# Altium PCB demo_dermis_main_testboard.PcbDoc (part 3 of 7)
Units mm, origin at the board's own origin, x right, y up, seen from the top; angles counter-clockwise.
Board outline 348.67 x 252.79 mm, 4 copper layers (Top Layer, Layer 1, Layer 2, Bottom Layer), stack 0.603 mm thick; 389 components, 231 nets, 2086 pads, 2626 vias.
Unrouted connection lines stored in the file: 34.
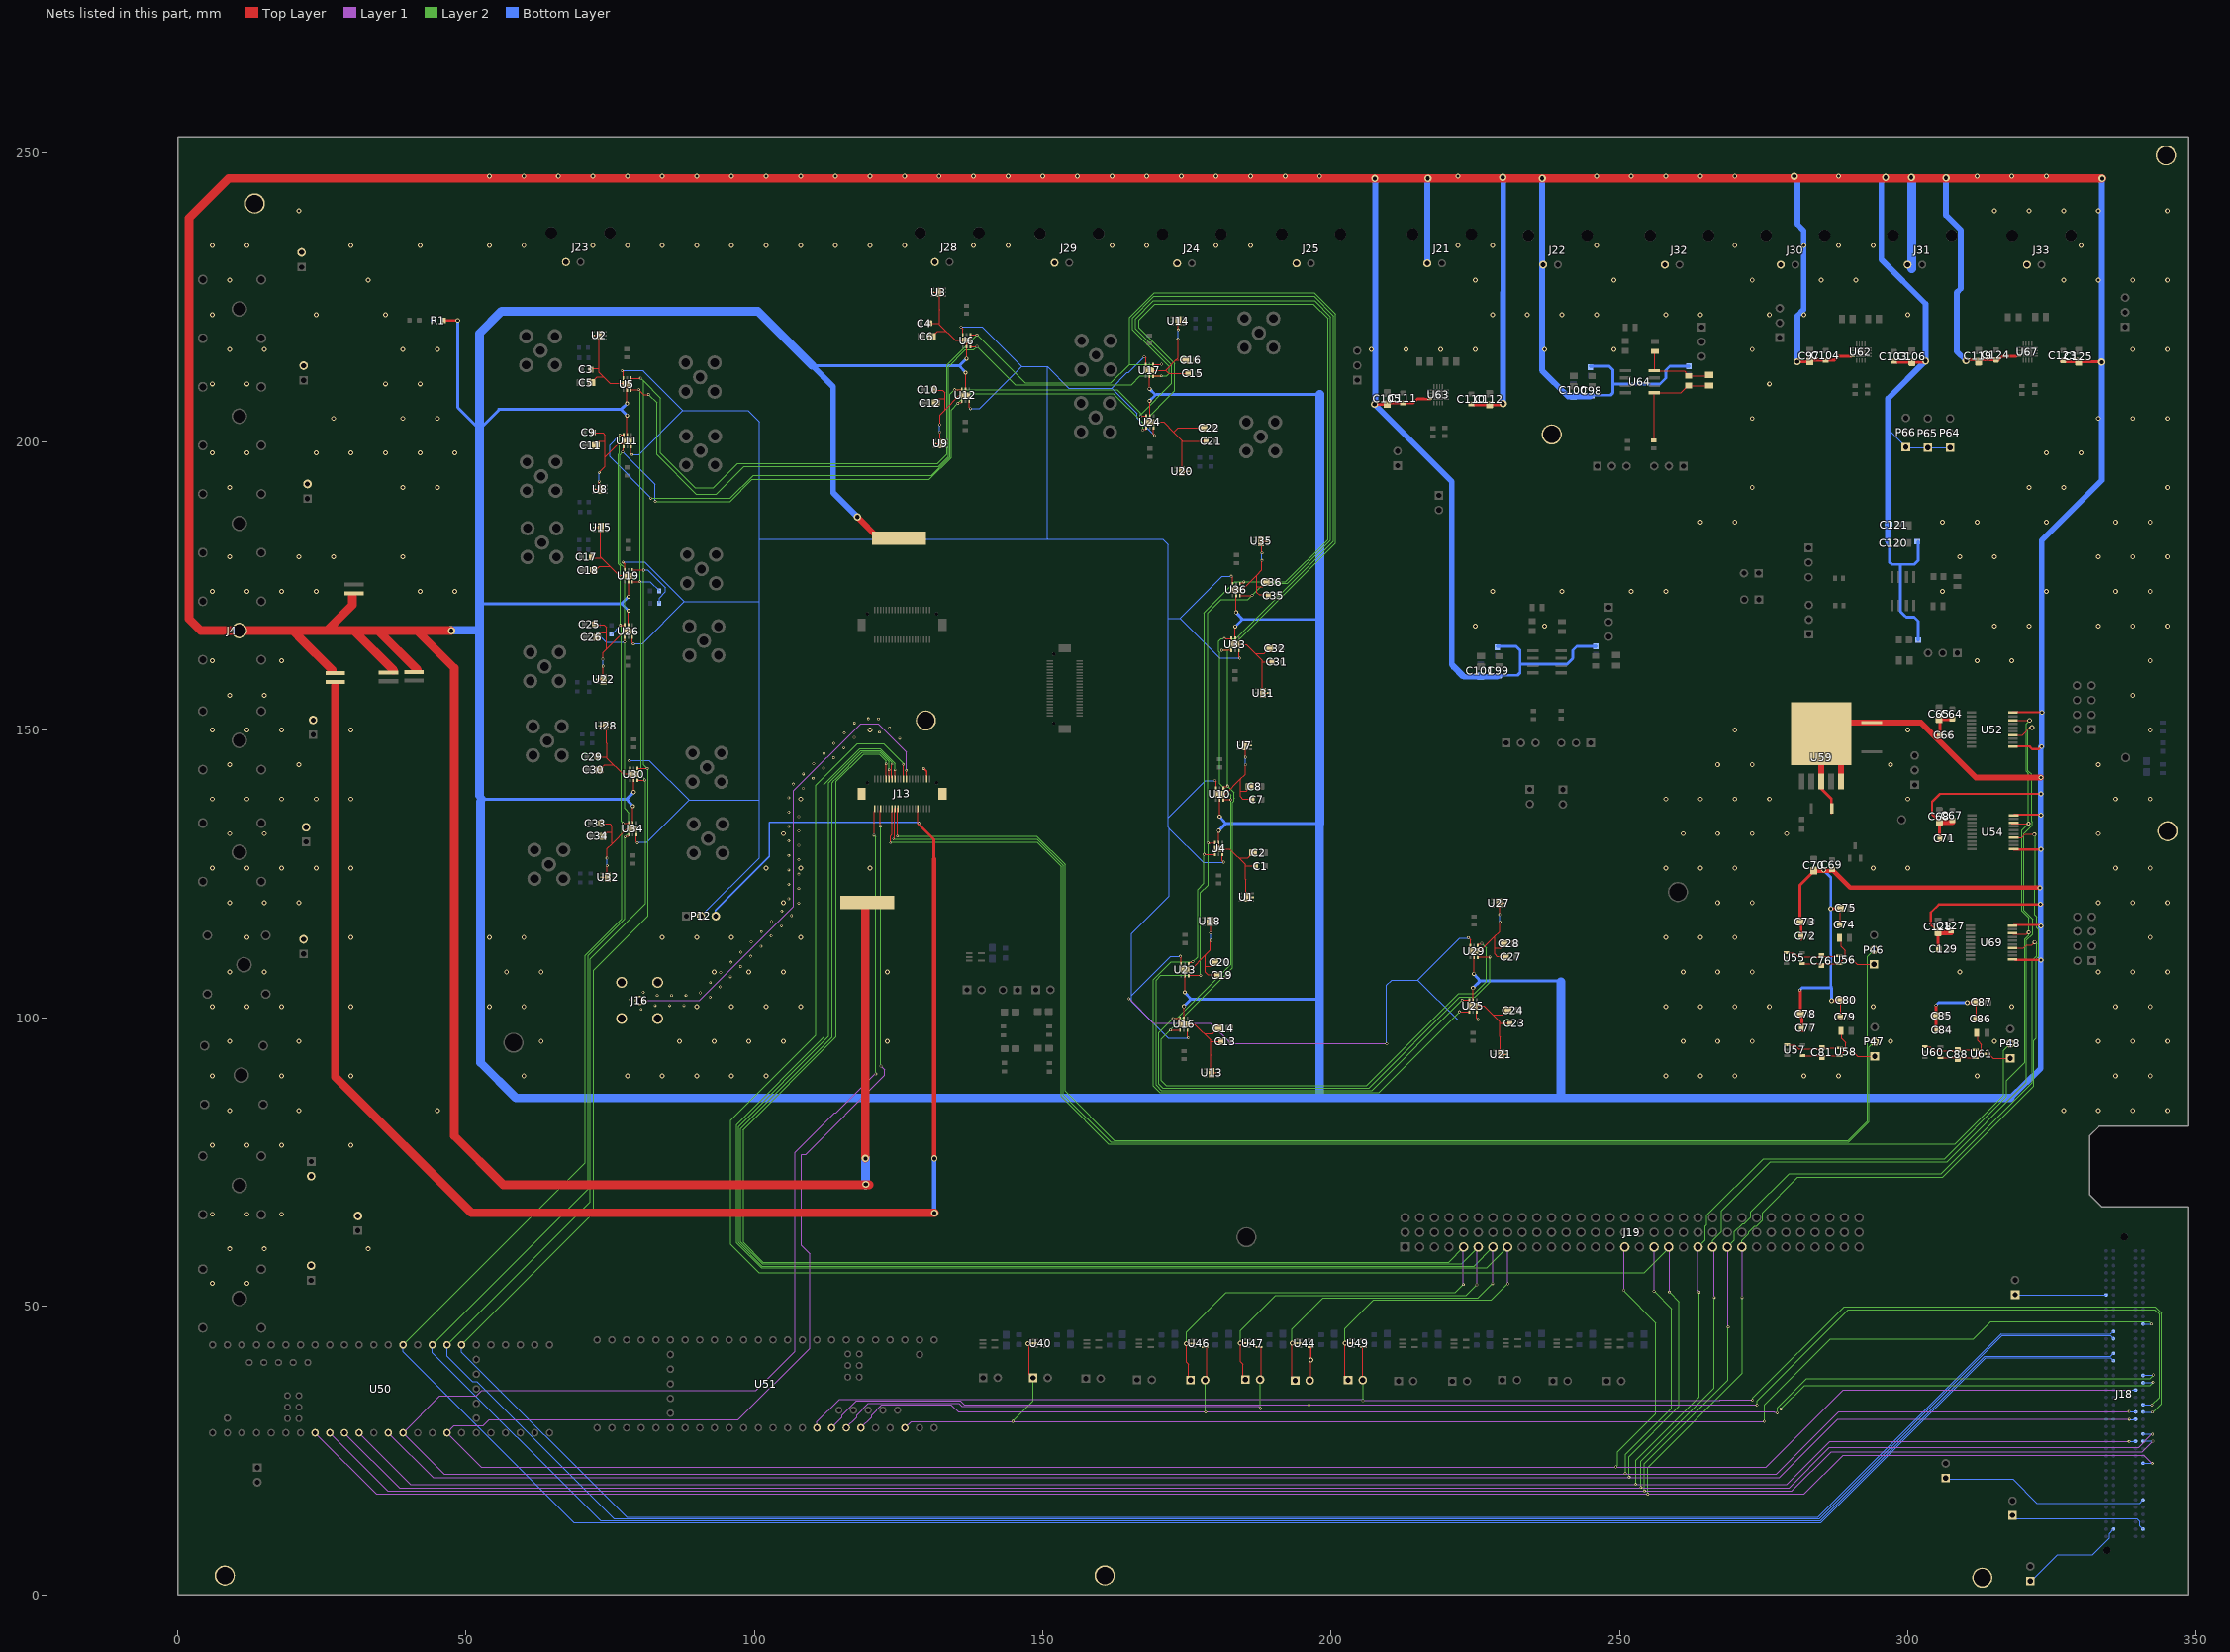
[diagram p4: the nets of this part, all layers, seen from the top]

## Via types
v1: diameter 0.4, hole 0.25, Top Layer to Bottom Layer, 1673 vias
v2: diameter 0.85, hole 0.5, Top Layer to Bottom Layer, 416 vias
v3: diameter 0.5, hole 0.3, Top Layer to Bottom Layer, 391 vias
v4: diameter 1.27, hole 0.711, Top Layer to Bottom Layer, 85 vias
v5: diameter 0.7, hole 0.4, Top Layer to Bottom Layer, 57 vias
v6: diameter 1.1, hole 0.7, Top Layer to Bottom Layer, 4 vias

## Nets (pads, with @x,y where several pads share a name; then routed paths per layer and width w, separated by ;. In a path a pad name is that pad's centre, name@x,y a point inside that pad or via, vN(x,y) a via of type N, cw(c..) or ccw(c..) an arc to the next point about the centre after c; other vN are vias at no path point) (continued)
ACK_EXT: J18.C11 P29.1 U40.2@148.545,43.598 U51.1 | length 243.6
  Top Layer w0.15: P29.1@148.298,37.636 147.622,38.311 147.622,43.179 147.397,43.405 v2(147.397,43.594) 147.399,43.596 148.543,43.596 U40.2@148.545,43.598
  Layer 1 w0.15: U51.1@126.068,28.974 127.164,30.07 144.797,30.07 267.052,30.071 275.119,30.071 v3(275.127,30.078)
  Layer 2 w0.15: v3(144.797,30.078) 144.797,30.118 148.298,33.619 P29.1@148.298,37.636 ; v3(275.127,30.078) 275.127,32.924 286.569,44.365 311.386,44.365 314.386,47.365 341.796,47.365 v3(342.218,46.943)
  Bottom Layer w0.15: J18.C11@340.746,46.956 340.752,46.949 342.212,46.949 v3(342.218,46.943)
ADDRX0: J13.31 J19.13 P36.1 U46.2@176.028,43.593 | length 296.2
  Top Layer w0.15: J13.31@122.841,141.53 v1@122.841,144.094 ; P36.1@175.245,36.979 175.245,40.007 174.879,40.373 v2(174.879,43.589) 174.881,43.592 176.026,43.592 U46.2@176.028,43.593
  Layer 1 w0.15: v3(222.897,53.82) J19.13@222.897,60.341
  Layer 2 w0.15: v1(122.84,144.095) 122.84,144.635 121.646,145.829 118.915,145.829 114.182,141.095 114.182,96.81 97.992,80.619 97.992,61.198 101.478,57.713 220.354,57.713 J19.13@222.964,60.323 ; v2(174.879,43.589) 174.879,45.548 181.739,52.409 221.485,52.409 v3(222.897,53.82)
ADDRX0_EXT: J18.C18 P36.2 U46.4@178.11,42.943 U51.4 | length 243
  Top Layer w0.15: U46.4@178.337,42.944 178.357,42.944 178.46,42.841 P36.2@178.46,37.245
  Layer 1 w0.15: U51.4@118.448,28.974 120.297,30.823 120.297,31.2 122.06,32.964 134.083,32.964 135.308,31.738 v3(178.214,31.739) 193.214,31.739 ; 193.232,31.72 276.796,31.72 276.877,31.639 277.281,31.639 v3(277.347,31.572)
  Layer 2 w0.15: P36.2@178.123,37.245 178.169,37.199 178.169,31.784 v3(178.214,31.739) ; v3(277.347,31.572) 277.347,32.464 282.414,37.53 341.97,37.53 v3(342.577,38.138)
  Bottom Layer w0.15: J18.C18@340.746,38.066 340.781,38.102 342.541,38.102 v3(342.577,38.138)
ADDRX1: J13.29 J19.16 P37.1 U47.2@185.4,43.638 | length 293.7
  Top Layer w0.15: J13.29@123.326,141.537 v1@123.326,143.061 ; P37.1@184.674,36.979 184.674,40.001 184.252,40.424 v2(184.252,43.634) 184.253,43.636 185.398,43.636 U47.2@185.4,43.638
  Layer 1 w0.15: v3(225.25,53.777) J19.16@225.25,60.362
  Layer 2 w0.15: v1(123.316,143.071) 123.316,144.512 121.699,146.129 118.731,146.129 114.044,141.442 114.038,141.442 113.836,141.239 113.836,141.233 113.438,140.835 113.438,96.74 97.551,80.853 97.551,61.231 101.37,57.413 222.594,57.412 J19.16@225.504,60.323 ; v2(184.252,43.634) 184.252,45.843 190.371,51.963 223.436,51.963 v3(225.25,53.777)
ADDRX1_EXT: J18.C19 P37.2 U47.4@187.483,42.988 U51.5 | length 243.7
  Top Layer w0.15: U47.4@187.483,42.988 187.727,42.988 U47.4@187.829,42.886 ; U47.4@187.829,42.988 U47.4@187.829,42.886 ; P37.2@187.89,37.332 187.829,37.392 U47.4@187.829,42.886
  Layer 1 w0.15: U51.5@115.908,28.974 117.757,30.823 117.757,31.2 119.77,33.214 135.435,33.214 135.969,32.679 187.371,32.679 187.753,32.297 277.948,32.297 v3(277.985,32.26)
  Layer 2 w0.15: P37.2@187.675,37.332 187.696,37.311 187.696,32.354 v3(187.717,32.334) ; v3(277.985,32.26) 282.066,36.342 342.004,36.342 v3(342.495,36.833)
  Bottom Layer w0.15: J18.C19@340.746,36.796 340.764,36.814 342.476,36.814 v3(342.495,36.833)
ADDRX2: J13.27 J19.19 P34.1 U44.2@194.362,43.633 | length 291.7
  Top Layer w0.15: J13.27@123.791,141.572 v1@123.791,144.021 ; P34.1@193.218,36.906 193.218,43.624 v2(193.213,43.629) 193.215,43.631 U44.2@194.362,43.633 U44.2@194.362,43.633
  Layer 1 w0.15: v3@228.012,53.976 J19.19@228.012,60.378
  Layer 2 w0.15: v1(123.823,144.052) 123.823,144.359 121.753,146.429 118.474,146.429 112.87,140.826 112.87,96.867 97.205,81.201 97.205,61.121 101.299,57.026 224.748,57.026 J19.19@228.044,60.323 ; v2(193.213,43.629) 193.213,46.083 198.59,51.46 225.475,51.46 v3@227.982,53.967
  other v3: 228.003,53.967
ADDRX2_EXT: J18.C22 P34.2 U44.4@196.444,42.983 U51.6 | length 271
  Top Layer w0.15: P34.2@196.432,37.166 196.432,42.708 ; v2(196.514,40.758) 196.514,42.626 196.432,42.708 ; U44.4@196.851,42.983 U44.4@196.652,42.983 ; 196.432,42.708 196.432,42.763 ; 196.432,42.708 196.405,42.736 196.432,42.763 ; 196.432,42.763 U44.4@196.652,42.983 ; 196.432,42.763 196.432,42.971 U44.4@196.444,42.983 U44.4@196.652,42.983
  Layer 1 w0.15: U51.6@113.368,28.974 115.217,30.823 115.217,31.2 117.664,33.648 135.682,33.648 136.382,32.948 v3(196.173,32.948) 211.173,32.948 273.833,32.947 v3(273.844,32.936)
  Layer 2 w0.15: v3(196.173,32.948) 196.173,36.93 196.112,36.991 P34.2@196.287,37.166 ; v3(273.844,32.936) 273.844,33.633 289.679,49.468 342.775,49.468 343.595,48.648 343.595,34.236 v3@342.296,32.938
  Bottom Layer w0.15: J18.C22@340.746,32.986 340.764,32.967 342.264,32.967 v3(342.282,32.948)
ADDRY0: J13.25 J19.22 P39.1 U49.2@203.531,43.643 | length 289.5
  Top Layer w0.15: J13.25@124.345,141.48 124.36,141.495 124.36,143.017 v1(124.374,143.032) ; P39.1@202.94,37.251 202.382,37.808 v2(202.382,43.639) 202.384,43.642 203.529,43.642 U49.2@203.531,43.643
  Layer 1 w0.15: v3@230.628,53.881 J19.22@230.628,60.25
  Layer 2 w0.15: v1(124.374,143.032) v1(124.374,143.032) v1(124.374,143.032) 124.373,144.174 121.818,146.729 118.284,146.729 112.031,140.477 112.032,96.703 96.905,81.576 96.905,60.996 101.174,56.727 226.988,56.727 J19.22@230.584,60.323 ; v2(202.382,43.639) 202.382,46.139 207.361,51.119 227.763,51.119 v3@230.606,53.961
  other v3: 230.641,53.936
ADDRY0_EXT: J18.C23 P39.2 U49.4@205.614,42.993 U51.7 | length 271.9
  Top Layer w0.15: P39.2@205.48,37.251 205.48,42.891 205.582,42.994 U49.4@205.614,42.993
  Layer 1 w0.15: U51.7@110.828,28.974 110.828,30.005 114.72,33.898 205.317,33.898 v3(205.512,33.703) ; v3@205.512,33.766 205.576,33.766 267.419,33.766 267.438,33.785 v3(273.074,33.785)
  Layer 2 w0.15: P39.2@205.48,37.251 205.512,37.218 v3(205.512,33.703) ; v3(273.074,33.785) 273.074,34.12 288.948,49.993 342.823,49.993 343.957,48.86 343.957,33.137 v3@342.483,31.663
  Bottom Layer w0.15: J18.C23@340.683,31.706 v3@342.183,31.706
  other v3: 342.376,31.674
AER_DIS: J13.36 J18.D20 J19.46 U50.40 | length 513
  Top Layer w0.15: 121.797,133.537 J13.36@121.797,136.036
  Layer 1 w0.15: v3(121.916,91.705) 122.576,91.044 122.576,90.078 108.883,76.384 108.225,76.384 108.167,76.326 108.167,60.566 109.565,59.168 109.565,42.756 97.176,30.367 54.009,30.367 52.99,29.349 47.91,29.349 U50.40@46.67,28.109 52.633,22.146 275.37,22.146 288.755,35.531 v3(338.34,35.531) ; v3@250.742,52.875 J19.46@250.742,60.043
  Layer 2 w0.15: v3(121.916,91.705) v3@121.916,133.267 ; v3(249.363,22.186) 249.363,22.19 249.697,22.524 249.697,24.82 256.275,31.399 256.275,47.142 250.735,52.681 v3(250.735,52.831)
  Bottom Layer w0.1: v3(338.34,35.531) v3@338.343,35.528
  Bottom Layer w0.15: v3@338.343,35.528 339.473,35.528 J18.D20@339.476,35.526
  other v3: 121.854,133.278
AGND: J13.10 P12.3 R3.2 | length 298.5
  Top Layer w0.2: v3@128.345,133.814 J13.10@128.345,136.33
  Top Layer w0.5: v3@128.447,133.694 131.119,131.023 131.119,127.592
  Top Layer w0.8: v6@131.119,75.52 131.119,127.592
  Top Layer w1.5: 27.31,157.646 27.31,89.827 50.888,66.249 v4@131.184,66.249
  Bottom Layer w0.25: P12.3@93.273,117.712 93.243,117.742 93.243,118.712 102.557,128.026 102.557,133.975 128.272,133.975 128.433,133.814 v3(128.512,133.814)
  Bottom Layer w0.8: v4@131.161,66.488 v6@131.161,75.603
  other v4: 131.201,66.22
  other v6: 131.193,75.675
AGND_VCM: P12.2 U4.3 U5.3 U6.3 U10.3 U11.3 U12.3 U16.3 U17.3 U19.3 U23.3 U24.3 U25.3 U26.3 U29.3 U30.3 U33.3 U34.3 U36.3 | length 639.5
  Top Layer w0.15: v3(77.003,212.281) 77.241,212.044 U5.3@77.241,210.991 ; v3(77.175,179.095) 77.51,178.761 77.51,177.821 U19.3@77.49,177.713 ; v3(78.249,144.624) 78.418,144.455 78.418,143.406 78.446,143.378 U30.3@78.418,143.334 ; U11.3@78.571,199.095 78.574,199.016 78.574,197.892 v3(78.729,197.737) ; U26.3@78.764,166.202 78.764,165.124 v3(79.024,164.864) ; U34.3@79.529,131.82 79.514,131.783 79.514,130.624 v3(79.703,130.435) ; v3(135.832,219.829) 136.133,219.529 136.133,218.58 136.16,218.553 U6.3@136.132,218.509 ; U12.3@137.243,206.995 137.228,206.958 137.228,205.902 v3(137.432,205.698) ; v3(167.593,214.702) 167.853,214.442 U17.3@167.853,213.412 ; U24.3@169.22,202.358 169.191,202.327 169.191,201.239 v3(169.41,201.019) ; v3(173.848,110.733) 174,110.581 174,109.469 U23.3@173.986,109.432 ; U16.3@175.097,97.918 175.068,97.874 175.096,97.846 175.061,97.811 175.061,96.79 v3(175.235,96.615) ; v3(179.858,141.211) 180.038,141.031 180.038,139.928 U10.3@180.023,139.892 ; U4.3@181.134,128.378 181.106,128.334 181.133,128.306 181.133,127.255 v3(181.343,127.045) ; v3(182.681,176.63) 182.898,176.413 182.898,175.342 U36.3@182.884,175.305 ; U33.3@183.995,163.791 183.966,163.747 183.994,163.72 183.994,162.597 v3(184.166,162.424) ; v3(223.796,113.973) 224.138,113.631 224.138,112.654 U29.3@224.123,112.617 ; U25.3@225.234,101.103 225.206,101.059 225.234,101.032 225.234,100.017 v3(225.458,99.793)
  Layer 1 w0.2: v3@164.928,103.402 164.928,103.386 169.16,99.154 179.038,99.154 182.62,95.572 v3(209.611,95.572)
  Bottom Layer w0.15: v3(78.729,197.737) 79.955,197.737 79.974,197.757 ; 87.588,205.354 87.588,205.37
  Bottom Layer w0.2: v3(77.003,212.281) 80.677,212.281 80.709,212.25 87.588,205.37 79.974,197.757 ; 77.453,179.12 80.948,179.12 87.828,172.241 80.555,164.969 79.024,164.969 78.791,164.969 ; v3@78.252,144.688 81.747,144.688 88.626,137.809 81.338,130.52 79.703,130.52 v3@79.542,130.52 ; 87.588,205.354 98.862,205.354 100.837,203.378 100.837,183.083 100.837,172.224 ; 87.828,172.224 100.837,172.224 ; 88.626,137.791 100.817,137.791 ; P12.2@90.733,117.712 100.837,127.816 100.837,137.791 100.837,172.224 ; 100.864,183.083 150.816,183.083 ; v3@135.966,219.863 139.461,219.863 146.341,212.983 ; v3@137.256,205.694 137.432,205.694 139.052,205.694 146.341,212.983 ; v3@164.909,103.386 165.418,103.386 ; v3(167.593,214.702) 164.842,211.951 164.642,211.951 161.949,209.258 ; v3(169.41,201.019) 166.362,204.067 166.362,204.844 161.949,209.258 ; v3@173.973,110.732 172.177,110.732 165.418,103.974 ; v3@175.262,96.564 171.767,96.564 165.418,102.913 165.418,103.386 ; v3@180.01,141.192 179.858,141.192 178.214,141.192 171.729,134.707 ; v3@181.3,127.024 177.805,127.024 171.932,132.896 ; v3@182.871,176.606 182.681,176.606 181.075,176.606 173.786,169.317 ; v3@184.16,162.437 180.665,162.437 173.786,169.317 ; v3(209.611,95.572) 209.611,105.708 210.532,106.629 215.026,106.629 ; 224.11,113.918 222.314,113.918 215.026,106.629 ; v3@225.4,99.749 221.905,99.749 215.026,106.629 ; 146.341,212.983 150.78,212.983 ; 150.78,212.983 150.78,183.12 150.816,183.083 ; 150.78,212.983 154.505,209.258 161.949,209.258 ; 150.816,183.083 170.763,183.083 171.729,182.117 171.729,169.29 ; 165.418,103.386 165.418,103.974 ; 165.418,103.974 165.418,114.67 171.932,121.184 171.932,132.896 ; 171.729,134.707 171.729,169.29 ; 171.729,134.707 171.729,133.099 171.932,132.896 ; 171.729,169.29 171.756,169.317 173.786,169.317
  other v3: 164.884,103.375
CATTN_SCL: J18.G13 R46.2 U5.6 U6.6 U10.6 U16.6 U17.6 U19.6 U29.6 U30.6 U33.6 U50.25 | length 910
  Top Layer w0.15: U5.6@78.541,208.934 78.611,209.003 v3(79.927,209.003) 80.785,208.145 v3(81.63,208.145) ; U19.6@78.939,175.699 v3(80.096,175.699) ; U30.6@79.717,141.277 79.781,141.317 79.794,141.304 v3(80.932,141.304) ; U6.6@137.432,216.451 137.495,216.491 137.508,216.478 v3(138.587,216.478) ; U17.6@169.118,211.316 169.218,211.374 v3(170.534,211.374) ; v3(172.582,99.949) 173.72,99.949 173.733,99.936 U16.6@173.797,99.975 ; U10.6@181.396,137.863 181.415,137.844 181.463,137.892 181.464,137.89 v3(182.623,137.89) ; v3(181.48,165.822) 182.618,165.822 182.631,165.809 U33.6@182.695,165.849 ; U29.6@225.496,110.588 225.515,110.569 225.563,110.617 v3(227.512,110.617)
  Layer 2 w0.15: U50.25@46.67,43.349 71.486,68.164 71.486,110.297 81.098,119.909 81.098,141.138 v3(80.932,141.304) 80.932,141.482 80.26,142.154 80.26,175.536 v3(80.096,175.699) 80.239,175.699 80.088,175.85 80.087,208.843 v3(79.927,209.003) ; v3(81.63,208.145) 83.067,206.709 83.067,197.724 89.887,190.903 93.401,190.903 98.193,195.696 131.892,195.696 133.622,197.426 133.622,212.95 136.564,215.891 138,215.891 v3(138.587,216.478) 145.219,209.846 165.351,209.846 166.878,211.374 v3(170.534,211.374) 171.485,211.374 171.887,211.775 171.887,213.005 165.527,219.365 165.527,221.419 169.264,225.156 197.047,225.156 200.433,221.77 200.433,182.741 183.514,165.822 v3(181.48,165.822) 180.951,165.822 180.484,165.354 180.484,163.584 180.636,163.431 180.636,140.668 182.623,138.681 v3(182.623,137.89) 182.623,109.329 173.242,99.949 v3(172.582,99.949) 170.105,97.471 170.105,88.602 170.812,87.895 206.558,87.895 222.321,103.659 224.91,103.659 227.512,106.261 v3(227.512,110.617)
  Bottom Layer w0.15: U50.25@46.67,43.349 46.67,41.393 51.061,37.002 51.845,37.002 75.658,13.188 284.632,13.188 316.384,44.941 335.141,44.941 J18.G13@335.666,44.416 ; v3(80.096,175.699) 81.875,175.699 83.473,174.101 R46.2@83.473,174.079
CATTN_SDA: J18.G12 R45.2 U5.1 U6.1 U10.1 U16.1 U17.1 U19.1 U29.1 U30.1 U33.1 U50.26 | length 908.7
  Top Layer w0.15: U5.1@78.541,210.991 78.561,211.012 78.586,210.986 v3(80.243,210.986) ; U19.1@78.79,177.713 78.889,177.707 v3(80.763,177.707) ; U30.1@79.732,143.324 v3(81.403,143.324) ; U6.1@137.446,218.499 v3(138.587,218.499) ; U17.1@169.118,213.373 169.169,213.381 169.18,213.392 v3(170.579,213.392) ; v3(172.111,97.928) U16.1@173.783,97.928 ; v3(181.009,163.801) U33.1@182.68,163.801 ; U10.1@181.442,140.126 v3@181.88,140.126 ; U29.1@225.542,112.851 v3@225.98,112.851
  Layer 2 w0.15: U50.26@49.21,43.349 72.114,66.252 72.114,108.326 81.573,117.785 81.573,143.155 v3(81.403,143.324) 80.763,143.965 v3(80.763,177.707) 80.749,177.722 80.749,208.403 80.763,208.417 80.763,210.481 ; v3(80.243,210.986) 80.258,210.986 80.763,210.481 ; v3(170.579,213.392) 165.036,213.392 ; v3(181.009,163.801) 182.006,163.801 ; v3(226.106,112.977) 226.92,112.162 226.92,106.374 224.816,104.269 222.117,104.269 206.146,88.298 171.433,88.298 170.571,89.161 170.571,96.387 v3(172.111,97.928) 182.9,108.717 182.9,137.425 183.148,137.673 183.148,138.108 183.123,138.133 183.123,139.159 v3(182.031,140.251) 182.031,163.776 182.006,163.801 ; 80.763,210.481 83.693,207.552 83.693,198.007 89.734,191.966 92.87,191.966 97.073,196.17 131.744,196.17 133.372,197.797 133.372,213.284 v3(138.587,218.499) 146.94,210.146 161.789,210.146 165.036,213.392 ; 165.036,213.392 165.036,221.53 169.303,225.797 197.056,225.797 200.759,222.094 200.759,182.394 182.166,163.801 182.006,163.801
  Bottom Layer w0.15: U50.26@49.21,43.349 49.21,42.054 77.826,13.438 284.392,13.438 316.231,45.278 ; v3(80.763,177.707) 81.454,177.707 84.533,174.629 84.533,173.922 83.476,172.865 R45.2@83.476,171.945 ; 316.195,45.209 316.213,45.191 335.17,45.191 J18.G12@335.666,45.686
CATTP_SCL: J18.G16 R44.2 U4.6 U11.6 U12.6 U23.6 U24.6 U25.6 U26.6 U34.6 U36.6 U50.12 | length 898.1
  Top Layer w0.15: v3(76.642,201.142) 77.226,201.142 77.244,201.124 U11.6@77.272,201.152 ; v3(76.727,168.146) 77.454,168.146 77.507,168.093 U26.6@77.547,168.133 ; v3(77.226,133.775) 78.044,133.775 78.137,133.868 U34.6@78.156,133.849 ; v3(134.696,208.985) 135.794,208.985 135.851,209.043 U12.6@135.87,209.024 ; v3(166.954,204.386) U24.6@167.929,204.386 ; U23.6@175.358,107.403 175.377,107.384 175.425,107.432 v3(177.375,107.432) ; v3(178.619,130.408) 179.758,130.408 179.771,130.395 U4.6@179.834,130.435 ; U36.6@184.256,173.276 184.275,173.257 184.323,173.305 v3(186.273,173.305) ; v3(222.72,103.134) 223.858,103.134 223.871,103.121 U25.6@223.935,103.16
  Layer 2 w0.15: U50.12@39.05,43.349 70.653,74.951 70.653,110.909 76.986,117.243 76.986,133.534 v3(77.226,133.775) 77.226,133.798 76.902,134.122 76.902,135.294 76.902,166.61 ; v3(76.642,201.142) 76.596,201.095 76.596,197.958 76.4,197.762 76.4,178.758 76.727,178.43 v3(76.727,168.146) ; 76.916,166.509 v3@76.916,168.01 ; v3(82.004,190.171) 95.817,190.171 99.801,194.155 130.705,194.155 133.872,197.322 133.872,208.161 v3(134.696,208.985) 134.697,208.984 162.896,208.984 166.954,204.926 v3@166.954,204.632 ; v3(166.954,204.386) v3@166.954,204.632 ; v3(222.72,103.134) 207.078,87.493 170.578,87.493 169.639,88.432 169.639,106.627 170.444,107.432 v3(177.375,107.432) 177.35,107.457 177.35,121.77 178.648,123.068 178.648,130.379 v3(178.619,130.408) 178.619,170.283 180.911,172.575 185.542,172.575 v3(186.273,173.305) 188.382,175.415 192.435,175.415 199.923,182.903 199.923,221.63 197.131,224.422 169.183,224.422 166.04,221.279 166.04,219.56 172.374,213.225 172.374,210.052 v3@166.954,204.632
  Bottom Layer w0.15: U50.12@39.05,43.349 39.05,42.176 68.696,12.53 284.946,12.53 313.516,41.101 335.17,41.101 J18.G16@335.666,40.606 ; R44.2@75.211,166.603 75.233,166.603 76.727,168.097 v3(76.727,168.146) ; v3(76.642,201.142) 74.895,199.395 74.895,197.4 82.004,190.291 v3(82.004,190.171)
CATTP_SDA: J18.G15 R43.2 U4.1 U11.1 U12.1 U23.1 U24.1 U25.1 U26.1 U34.1 U36.1 U50.24 | length 880.6
  Top Layer w0.15: v3(77.121,198.224) 77.121,198.318 77.272,198.469 U11.1@77.272,199.095 ; U26.1@77.392,165.845 77.469,165.769 v3(77.469,165.239) ; v3@77.672,131.586 U34.1@78.11,131.586 ; v3@135.386,206.761 U12.1@135.824,206.761 ; v3@167.445,202.123 U24.1@167.883,202.123 ; U23.1@175.404,109.666 v3@175.843,109.666 ; v3(177.942,128.399) 179.808,128.399 U4.1@179.82,128.387 ; U36.1@184.302,175.539 v3@184.74,175.539 ; v3(222.249,101.113) U25.1@223.92,101.113
  Layer 2 w0.15: U50.24@44.13,43.349 71.186,70.404 71.186,110.913 77.546,117.273 v3(77.546,131.46) 78.208,132.123 78.208,135.641 77.469,136.38 v3(77.469,165.239) 77.469,178.059 76.65,178.878 76.65,197.658 77.121,198.129 v3(77.121,198.224) ; v3(82.778,189.592) 95.744,189.592 99.569,193.416 130.32,193.416 134.122,197.219 134.122,205.497 v3(135.26,206.635) 136.95,208.325 162.24,208.325 167.319,203.246 ; v3(167.319,201.998) 167.319,203.246 ; 176.847,122.303 176.847,110.67 v3(175.968,109.792) 172.288,109.792 169.171,106.675 169.171,88.228 170.276,87.124 208.26,87.124 v3(222.249,101.113) ; 176.857,122.303 177.942,123.388 v3(177.942,128.399) 177.942,128.594 177.939,128.597 177.939,170.276 183.328,175.665 v3(184.866,175.665) 192.095,175.665 199.436,183.006 199.436,221.3 196.909,223.826 169.447,223.826 166.684,221.063 166.684,219.715 172.891,213.508 172.891,208.834 167.319,203.262 167.319,203.246
  Bottom Layer w0.15: U50.24@44.13,43.349 44.13,41.981 73.269,12.842 284.81,12.842 313.318,41.351 335.141,41.351 J18.G15@335.666,41.876 ; R43.2@72.904,166.56 72.927,166.56 73.727,165.759 73.727,165.737 74.225,165.239 v3(77.469,165.239) ; v3(77.121,198.224) 82.778,192.567 v3(82.778,189.592)
CLK: J13.17 J16.1 | length 84.6
  Top Layer w0.15: J13.17@126.345,141.48 v1@126.345,142.977
  Layer 1 w0.15: 126.179,146.332 126.342,146.169 126.342,143.004 v1(126.347,142.999)
  Layer 1 w0.2: J16.1@80.069,103.068 90.485,103.068 106.799,119.382 106.799,139.443 118.407,151.051 121.46,151.051 126.179,146.332
CSb_IDAC: J18.C30 J19.70 U50.19 U54.14 | length 489.5
  Top Layer w0.2: U54.14@317.876,131.301 U54.14@318.359,131.301 319.748,131.301 320.318,131.871 321.878,131.871 321.907,131.841 v5(321.943,131.841)
  Layer 1 w0.15: U50.19@23.81,28.109 34.424,17.495 282.026,17.495 288.759,24.229 340.868,24.229 v3@342.343,22.754
  Layer 1 w0.2: v3(271.261,51.567) J19.70@271.261,60.017
  Layer 2 w0.15: v3(254.896,17.49) 254.896,22.103 271.261,38.468 v3(271.261,51.567) ; J19.70@271.224,60.323 271.224,61.448 272.43,62.655 272.43,62.943 273.453,63.966 273.741,63.966 274.764,64.988 274.764,66.251 280.908,72.396 306.001,72.396 321.844,88.239 321.844,96.112 322.256,96.524 322.256,110.276 322.707,110.727 322.707,115.385 322.382,115.71 322.382,117.601 322.022,117.961 322.022,122.988 322.107,123.073 322.107,131.677 v5(321.943,131.841)
  Bottom Layer w0.15: J18.C30@340.66,22.796 v3@342.16,22.796
  other v3: 342.353,22.764
CSb_VDAC: J18.C26 J19.64 U50.17 U52.14 | length 506
  Top Layer w0.2: U52.14@318.51,149.1 318.524,149.086 319.853,149.086 v2@321.359,150.593
  Layer 1 w0.15: U50.17@28.89,28.109 38.42,18.579 279.404,18.579 286.424,25.598 340.001,25.598 v3@342.344,27.942
  Layer 1 w0.2: v3(266.41,51.564) J19.64@266.41,60.178
  Layer 2 w0.15: v3(253.71,18.625) 253.71,23.152 266.41,35.852 v3(266.41,51.564) ; J19.64@266.144,60.323 266.144,61.448 267.684,62.988 267.684,66.618 276.203,75.137 306.803,75.137 320.576,88.91 320.576,113.522 321.632,114.578 321.632,117.174 320.099,118.707 320.099,132.009 321.571,133.481 321.571,134.02 321.45,134.141 321.45,142.288 320.841,142.897 320.841,150.074 321.349,150.583 v2@321.359,150.593
  Bottom Layer w0.15: J18.C26@340.741,27.884 v3@342.24,27.884
  other v2: 321.513,150.42
  other v3: 342.434,27.852
CSb_VDAC_COMP: J18.C27 J19.67 U50.18 U69.14 | length 468.9
  Top Layer w0.2: U69.14@318.16,112.147 320.033,112.147 320.603,112.717 321.531,112.717 v5(321.989,113.176)
  Layer 1 w0.15: U50.18@26.35,28.109 36.427,18.032 v3(254.305,18.032) 279.897,18.032 286.692,24.828 340.653,24.828 v3(342.469,26.643)
  Layer 1 w0.2: v3(268.837,46.439) J19.67@268.837,60.425
  Layer 2 w0.15: v3(254.305,18.032) 254.305,22.753 268.837,37.286 v3(268.837,46.439) ; J19.67@268.684,60.323 269.942,61.581 269.942,62.995 271.35,64.403 271.638,64.403 272.764,65.528 272.764,66.421 279.416,73.073 305.8,73.073 321.594,88.868 321.594,110.065 322.349,110.82 322.349,112.816 v5(321.989,113.176)
  Bottom Layer w0.15: J18.C27@340.775,26.675 v3@342.275,26.675
CT_MODE: J13.19 J18.D24 J19.55 U50.14 | length 629.3
  Top Layer w0.15: v1(125.831,144.007) 125.799,143.975 125.799,141.526 J13.19@125.845,141.48
  Layer 1 w0.15: U50.14@36.51,28.109 44.272,20.346 277.715,20.346 287.825,30.457 v3(338.404,30.457) ; v3(258.658,52.534) J19.55@258.658,60.323
  Layer 2 w0.15: v1(125.831,144.007) 125.831,144.19 122.367,147.654 117.87,147.654 110.591,140.375 110.591,97.063 95.852,82.324 95.852,60.777 100.766,55.862 254.313,55.862 258.524,60.073 J19.55@258.524,60.323 ; v3(251.652,20.437) 251.652,23.991 260.343,32.683 260.343,50.849 v3(258.658,52.534)
  Bottom Layer w0.15: v3@338.443,30.418 J18.D24@339.456,30.418
FPGA_3P3V: J18.C39 P41.1 | length 24
  Bottom Layer w0.15: P41.1@318.148,13.786 318.723,13.211 339.701,13.211 340.176,12.735 340.176,11.965 J18.C39@340.746,11.396
FPGA_12V: J18.C35 P40.1 | length 36.2
  Bottom Layer w0.15: P40.1@306.568,20.257 306.775,20.05 318.241,20.05 322.365,15.926 ; 322.365,15.901 340.171,15.901 J18.C35@340.746,16.476
FPGA_TEST0: J18.H07 P42.1 | length 15.8
  Bottom Layer w0.15: P42.1@318.599,52.058 318.622,52.036 J18.H07@334.396,52.036
FPGA_VADJ: J18.G39 P43.1 | length 18.8
  Bottom Layer w0.15: P43.1@321.125,2.155 325.941,6.972 332.012,6.972 334.941,9.9 334.941,10.671 J18.G39@335.666,11.396
GAIN_HI: J13.40 J18.D23 J19.52 U50.13 | length 525.3
  Top Layer w0.15: 120.732,131.978 J13.40@120.732,135.863
  Layer 1 w0.15: v3(121.036,90.314) 120.885,90.314 114.159,83.588 113.894,83.588 107.059,76.753 107.059,42.269 100.251,35.461 52.726,35.461 51.761,34.496 45.438,34.496 U50.13@39.05,28.109 46.218,20.941 251.003,20.941 251.413,20.941 251.434,20.962 251.869,20.962 251.891,20.941 277.177,20.941 288.029,31.794 v3(338.384,31.794) ; v3(255.977,52.674) J19.52@255.977,60.323
  Layer 2 w0.15: v3@120.745,131.877 120.745,131.719 121.036,131.427 v3(121.036,90.314) ; v3(251.003,21.047) 251.003,24.336 259.021,32.354 259.021,49.63 v3(255.977,52.674)
  Bottom Layer w0.15: v3(338.384,31.794) 338.423,31.755 339.437,31.755 J18.D23@339.476,31.716
  other v3: 120.707,131.719
GND: C1.2 C2.2 C3.2 C4.2 C5.2 C6.2 C7.2 C8.2 C9.2 C10.2 C11.2 C12.2 C13.2 C14.2 C15.2 C16.2 C17.2 C18.2 C19.2 C20.2 C21.2 C22.2 C23.2 C24.2 C25.2 C26.2 C27.2 C28.2 C29.2 C30.2 C31.2 C32.2 C33.2 C34.2 C35.2 C36.2 C64.2 C65.2 C66.2 C67.2 C68.2 C69.2 C70.2 C71.2 C72.2 C73.2 C74.2 C75.2 C77.2 C78.2 C79.2 C80.2 C82.2 C83.2 C84.2 C85.2 C86.2 C87.2 C89.2 C90.2 C97.1 C98.2 C99.2 C100.2 C101.2 C103.2 C104.1 C105.1 C106.2 C108.2 C109.2 C110.2 C111.1 C112.2 C115.2 C119.1 C120.2 C121.2 C123.2 C124.1 C125.2 C126.2 C127.2 C128.2 C129.2 J4.1 J13.3 J13.S1 J13.S2 J14.1 J15.1 J16.2 J16.3 J16.4 J16.5 J21.1 J22.1 J23.1 J24.1 J25.1 J28.1 J29.1 J30.1 J31.1 J32.1 J33.1 P1.2 P2.2 P3.2 P4.2 P5.2 P6.2 P7.2 P8.2 P9.2 P64.1 P65.1 P66.1 pad.3@8.139,3.365 pad.3@13.354,241.272 pad.3@129.713,151.619 pad.3@160.728,3.388 pad.3@238.23,201.224 pad.3@312.919,2.984 pad.3@344.731,249.608 pad.3@345.027,132.439 R1.2 R2.1 R3.1 R4.1 R5.1 U1.5 U1.7 U2.5 U2.7 U3.5 U3.7 U4.5 U4.7 U5.5 U5.7 U6.5 U6.7 U7.5 U7.7 U8.5 U8.7 U9.5 U9.7 U10.5 U10.7 U11.5 U11.7 U12.5 U12.7 U13.5 U13.7 U14.5 U14.7 U15.5 U15.7 U16.5 U16.7 U17.5 U17.7 U18.5 U18.7 U19.5 U19.7 U20.5 U20.7 U21.5 U21.7 U22.5 U22.7 U23.5 U23.7 U24.5 U24.7 U25.5 U25.7 U26.5 U26.7 U27.5 U27.7 U28.5 U28.7 U29.5 U29.7 U30.5 U30.7 U31.5 U31.7 U32.5 U32.7 U33.5 U33.7 U34.5 U34.7 U35.5 U35.7 U36.5 U36.7 U52.11 U52.20 U54.11 U54.20 U59.3 U59.5 U59.6 U62.16 U63.16 U67.16 U69.11 U69.20 | length 2911.2
  Top Layer w0.15: U15.5@72.283,185.099 73.309,185.099 U15.7@73.312,185.099 ; 171.266,212.33 171.792,211.804 C15.2@175.184,211.804 ; 172.719,201.618 173.438,202.337 C22.2@177.892,202.337 ; 173.035,214.099 C16.2@174.754,214.099 ; U14.7@173.477,220.9 U14.5@174.506,220.9 ; 174.158,200.053 174.17,200.042 C21.2@178.322,200.042 ; C75.2@287.999,118.994 288.253,118.994 C75.2@288.263,119.087 ; C80.2@288.1,103.043 288.354,103.043 C80.2@288.364,103.135 ; C87.2@311.63,102.709 311.884,102.709 C87.2@311.894,102.802
  Top Layer w0.2: C3.2@71.358,212.66 73.023,212.66 ; C5.2@71.779,210.373 71.855,210.373 72.705,211.223 73.797,211.223 ; C17.2@71.82,179.808 73.48,179.808 ; C9.2@71.947,201.474 71.957,201.486 73.69,201.486 74.103,201.072 74.103,200.074 ; U2.5@72.034,218.377 U2.7@73.062,218.377 73.062,211.957 73.797,211.223 ; C11.2@72.111,199.224 72.186,199.224 73.036,200.074 74.103,200.074 ; C25.2@72.157,168.208 73.89,168.208 74.303,167.795 74.303,166.797 ; U8.5@72.22,191.718 U8.7@73.249,191.718 73.082,191.885 v3(73.082,193.079) ; C18.2@72.316,177.521 73.166,178.371 74.824,178.371 ; C26.2@72.385,165.946 73.236,166.797 74.303,166.797 ; C29.2@72.667,145.331 74.327,145.331 ; U22.5@72.791,158.73 U22.7@73.82,158.73 ; v3(73.06,194.625) 74.103,195.667 74.103,197.315 ; C30.2@73.088,143.044 73.163,143.044 74.013,143.894 75.544,143.894 ; C33.2@73.171,133.707 74.903,133.707 75.316,133.295 75.316,132.296 ; U28.5@73.21,150.72 U28.7@74.239,150.72 ; U15.7@73.309,185.099 73.309,179.98 73.48,179.808 ; C34.2@73.399,131.446 74.25,132.296 75.316,132.296 ; U32.5@73.536,124.443 U32.7@74.565,124.443 ; U22.7@73.731,159.505 v3(73.731,161.057) ; v3@73.754,162.291 73.754,163.438 77.64,167.324 U26.7@78.149,167.324 ; 74.303,164.037 74.303,166.797 ; U28.7@74.407,150.552 74.374,150.518 74.374,147.68 74.407,147.646 74.407,145.073 77.135,142.344 U30.7@78.516,142.344 ; U32.7@74.427,125.001 v3(74.427,126.473) ; v3@74.45,127.786 74.45,129.428 75.335,130.313 ; U19.7@77.49,176.778 76.51,176.778 73.48,179.808 ; U11.5@77.891,200.878 v5(77.891,204.498) ; v5(77.891,206.59) U5.5@77.891,208.934 77.891,209.4 77.61,209.682 77.172,210.12 74.9,210.12 73.797,211.223 ; U11.5@77.922,201.152 U11.7@77.922,200.124 77.501,199.703 76.491,199.703 74.103,197.315 ; U26.7@78.151,167.136 v5(78.151,170.65) ; v5(78.157,173.096) U19.7@78.157,176.706 ; U34.7@78.878,132.849 78.845,132.819 77.841,132.819 75.335,130.313 ; U34.7@78.893,133.239 v5(78.893,136.753) ; v5(79.052,139.199) U30.7@79.052,142.259 ; C4.2@130.381,220.506 132.041,220.506 ; C6.2@130.802,218.218 130.877,218.218 131.727,219.068 133.259,219.068 ; C10.2@130.885,208.882 132.618,208.882 133.031,208.469 133.031,207.471 ; U3.5@130.924,225.895 U3.7@131.953,225.895 ; C12.2@131.114,206.621 131.964,207.471 133.031,207.471 ; U9.5@131.25,199.618 U9.7@132.279,199.618 ; U3.7@132.121,225.727 132.088,225.693 132.088,222.854 132.121,222.821 132.121,220.247 134.849,217.519 U6.7@136.231,217.519 ; U9.7@132.141,200.175 v3(132.141,201.647) ; v3@132.165,202.961 132.165,204.603 133.049,205.487 ; U12.7@136.593,208.023 136.559,207.994 135.555,207.994 133.049,205.487 ; U12.7@136.607,208.414 v5(136.607,211.928) ; v5(136.766,214.373) U6.7@136.766,217.434 ; U17.5@168.469,211.316 U17.7@168.469,212.345 168.482,212.33 171.266,212.33 173.035,214.099 173.445,214.51 v3@173.445,217.901 ; v5@168.476,209.147 U17.5@168.476,211.308 ; v5@168.523,207.008 168.523,203.434 U24.7@168.57,203.387 ; U24.7@169.379,203.394 170.943,203.394 172.719,201.618 174.158,200.179 174.158,200.053 174.158,194.824 U20.5@175.151,194.824 ; v3(173.469,219.369) U14.7@173.469,220.92 ; U16.7@174.463,98.993 v5(174.463,102.054) ; v5(174.621,104.499) U23.7@174.621,108.013 ; U23.7@174.636,108.403 174.669,108.433 175.673,108.433 178.18,110.94 ; U16.7@174.998,98.908 176.379,98.908 179.107,96.179 179.107,93.606 179.141,93.573 179.141,90.734 U13.7@179.107,90.7 ; 177.97,97.358 179.501,97.358 180.351,98.209 C14.2@180.426,98.209 ; U18.7@178.95,116.809 U18.5@179.978,116.809 ; v3@179.064,113.466 179.064,111.824 178.18,110.94 ; v3(179.088,114.779) U18.7@179.088,116.251 ; 179.188,95.921 C13.2@180.848,95.921 ; U13.7@179.275,90.532 U13.5@180.304,90.532 ; C20.2@180.115,109.806 179.265,108.956 178.198,108.956 ; C19.2@180.343,107.545 178.611,107.545 178.198,107.957 178.198,108.956 ; U4.7@180.5,129.453 v5(180.5,132.513) ; v5(180.659,134.959) U10.7@180.659,138.473 ; U10.7@180.673,138.863 180.706,138.893 181.711,138.893 184.217,141.399 ; U4.7@181.035,129.367 182.417,129.367 185.145,126.639 185.145,124.066 185.178,124.032 185.178,121.193 U1.7@185.145,121.16 ; U33.7@183.361,164.866 v5(183.361,167.927) ; v5(183.519,170.372) U36.7@183.519,173.886 ; U36.7@183.534,174.277 183.567,174.306 184.571,174.306 187.078,176.813 ; U33.7@183.896,164.781 185.277,164.781 188.005,162.053 188.005,159.479 188.039,159.446 188.039,156.607 U31.7@188.005,156.573 ; 184.007,127.818 185.539,127.818 186.389,128.668 C2.2@186.464,128.668 ; U7.7@184.987,147.269 U7.5@186.016,147.269 ; v3@185.101,143.925 185.101,142.283 184.217,141.399 ; v3(185.125,145.239) U7.7@185.125,146.711 ; 185.225,126.381 C1.2@186.885,126.381 ; U1.7@185.313,120.992 U1.5@186.341,120.992 ; C8.2@186.152,140.266 185.302,139.416 184.235,139.416 ; C7.2@186.381,138.004 184.648,138.004 184.235,138.417 184.235,139.416 ; 186.868,163.232 188.399,163.232 189.249,164.082 C32.2@189.324,164.082 ; U35.7@187.847,182.682 U35.5@188.876,182.682 ; v3@187.962,179.339 187.962,177.697 187.078,176.813 ; v3(187.986,180.653) U35.7@187.986,182.125 ; 188.085,161.794 C31.2@189.746,161.794 ; U31.7@188.173,156.405 U31.5@189.202,156.405 ; C36.2@189.013,175.679 188.163,174.829 187.096,174.829 ; C35.2@189.241,173.418 187.509,173.418 187.096,173.831 187.096,174.829 ; C110.2@224.309,206.526 C110.2@224.444,206.391 ; U25.7@224.6,102.178 v5(224.6,105.239) ; v5(224.759,107.684) U29.7@224.759,111.198 ; U29.7@224.774,111.589 224.807,111.618 225.811,111.618 228.317,114.125 ; U25.7@225.136,102.093 226.517,102.093 229.245,99.365 229.245,96.791 229.278,96.758 229.278,93.919 U21.7@229.245,93.885 ; 228.108,100.544 229.639,100.544 230.489,101.394 C24.2@230.564,101.394 ; U27.7@229.087,119.994 U27.5@230.116,119.994 ; v3@229.201,116.651 229.201,115.009 228.317,114.125 ; v3(229.225,117.965) U27.7@229.225,119.436 ; 229.325,99.106 C23.2@230.985,99.106 ; U21.7@229.413,93.717 U21.5@230.442,93.717 ; C28.2@230.252,112.991 229.402,112.141 228.336,112.141 ; C27.2@230.481,110.73 228.749,110.73 228.336,111.143 228.336,112.141 ; U59.6@287.664,147.017 U59.6@288.412,147.017 ; C75.2@287.999,118.994 288.265,118.728 C74.2@288.265,116.454 ; C80.2@288.1,103.043 288.366,102.777 C79.2@288.366,100.503 ; C103.2@297.586,213.898 C103.2@297.721,213.762 ; C128.2@305.237,114.903 C128.2@305.237,114.979 ; C68.2@305.453,134.057 C68.2@305.453,134.132 ; C87.2@311.63,102.709 311.896,102.443 C86.2@311.896,100.169 ; 74.103,197.315 74.103,200.074 ; 75.316,132.296 75.316,130.33 75.335,130.313 ; 133.031,207.471 133.031,205.505 133.049,205.487 ; 178.18,110.94 178.198,110.922 178.198,108.956 ; 184.217,141.399 184.235,141.381 184.235,139.416 ; 187.078,176.813 187.096,176.795 187.096,174.829 ; 228.317,114.125 228.336,114.107 228.336,112.141
  Top Layer w0.3: v3(129.347,143.314) 129.845,142.815 129.845,141.999 J13.3@129.845,141.48
  Top Layer w0.4: C128.2@305.237,114.979 303.993,116.222 303.993,118.353 305.378,119.738 v2@323.328,119.738 ; C68.2@305.453,134.132 304.209,135.376 304.209,137.507 305.594,138.892 v2(323.044,138.892) ; U52.11@318.253,147.136 321.092,147.136 321.579,146.649 322.625,146.649 v2@323.107,147.131 ; U52.20@318.253,152.986 318.253,153.015 318.298,153.061 v2@323.235,153.061 ; U54.11@318.359,129.351 318.359,129.272 v2@322.991,129.272 ; U69.20@318.419,116.168 v2@323.103,116.168 ; U54.20@318.446,135.288 v2@323.129,135.288 ; U69.11@318.643,110.197 318.643,110.118 v2@323.276,110.118
  Top Layer w0.5: R1.2@46.195,220.992 v2(48.535,220.992) ; v5@168.476,209.147 v5(168.485,209.139) ; v5(168.485,207.047) v5@168.523,207.008 ; v4(207.524,206.448) 207.545,206.469 209.696,206.469 C105.1@209.717,206.49 209.929,206.702 214.246,206.702 ; 214.222,206.679 214.246,206.702 ; 214.254,206.702 214.246,206.702 ; 216.116,207.379 216.092,207.403 214.947,207.403 214.246,206.702 ; 216.143,207.353 U63.16@217.143,207.353 ; C110.2@224.444,206.391 C112.2@227.435,206.391 v4@229.692,206.391 ; v4(280.801,213.819) 280.822,213.841 282.973,213.841 C97.1@282.994,213.861 283.206,214.073 287.308,214.073 288.009,214.774 289.203,214.774 289.229,214.747 U62.16@290.229,214.747 ; C73.2@281.254,116.724 281.254,123.035 283.718,125.499 C70.2@283.718,125.573 ; C73.2@281.268,116.581 281.268,116.112 281.495,115.885 281.495,113.699 ; C78.2@281.355,100.773 v3@281.355,104.837 ; C78.2@281.369,100.63 281.369,100.161 281.596,99.934 281.596,97.748 ; U59.3@284.829,141.851 284.829,139.933 286.731,138.031 C82.2@286.731,135.635 ; v2(286.643,118.994) C75.2@287.999,118.994 ; v2(286.744,103.043) C80.2@288.1,103.043 ; C103.2@297.721,213.762 C106.2@300.712,213.762 v4@302.969,213.762 ; C84.2@304.899,97.846 v3(304.899,102.272) ; C129.2@305.237,111.716 C128.2@305.237,114.602 ; C71.2@305.453,130.869 C68.2@305.453,133.755 ; C66.2@305.533,149.052 305.603,149.052 C65.2@305.603,151.556 ; C65.2@305.603,151.775 C64.2@307.866,151.775 ; v4(310.107,214.002) 310.237,214.133 315.703,214.133 316.354,214.783 318.746,214.783 ; v2(310.274,102.709) C87.2@311.63,102.709 ; C123.2@326.617,213.822 v4@333.653,213.822
  Top Layer w0.8: C70.2@283.718,125.573 C69.2@286.652,125.573 ; C69.2@286.841,125.763 286.891,125.763 290.019,122.634 312.945,122.634 312.917,122.631 v2(322.882,122.631)
  Top Layer w1: v4(117.844,186.91) 121.502,183.253 J14.1@125.062,183.253 ; U59.3@284.985,141.728 U59.6@284.985,149.335 ; U59.6@286.392,147.927 U59.6@284.985,149.335 ; U59.5@288.412,141.711 U59.6@288.412,147.017 ; 302.08,151.275 286.919,151.275 U59.6@284.982,149.338 U59.6@284.985,149.335 ; 302.255,151.275 305.005,148.525 311.793,141.737 v2(323.064,141.737) ; C128.2@305.237,114.821 C127.2@307.501,114.821 ; C68.2@305.453,133.974 C67.2@307.716,133.974
  Top Layer w1.5: 8.803,245.641 1.933,238.771 1.933,169.255 3.968,167.22 J4.1@10.67,167.22 19.924,167.22 ; 9.092,245.64 178.117,245.64 207.57,245.64 216.759,245.64 229.749,245.64 236.597,245.64 280.288,245.64 296.124,245.641 306.617,245.641 v4@333.69,245.641 ; 26.805,160.339 26.197,160.947 21.822,165.322 19.924,167.22 ; 30.265,173.167 30.265,171.63 25.855,167.22 ; 37.411,160.306 30.497,167.22 ; R5.1@41.528,160.381 34.688,167.22 ; v4@47.404,167.22 41.422,167.22 ; v4@119.234,75.68 J15.1@119.235,119.782 ; v4@119.894,71.125 56.418,71.125 47.941,79.602 47.941,160.701 41.422,167.22 ; 239.751,245.613 243.251,245.609 246.751,245.605 ; 19.924,167.22 25.855,167.22 ; 25.855,167.22 30.497,167.22 ; 30.497,167.22 34.688,167.22 ; 34.688,167.22 41.422,167.22
  Bottom Layer w0.15: v4@47.286,167.274 47.44,167.12 v4(47.44,167.184)
  Bottom Layer w0.2: v3(73.06,194.625) 73.082,194.603 v3(73.082,193.079) ; v3@73.719,161.067 v3@73.719,162.234 ; v3@74.415,126.563 v3@74.415,127.729 ; v3@132.13,201.738 v3@132.13,202.904 ; v3@173.48,217.901 v3@173.48,219.358 ; v3@179.099,113.523 v3@179.099,114.689 ; v3@185.136,143.982 v3@185.136,145.149 ; v3@187.997,179.396 v3@187.997,180.562 ; v3@229.236,116.708 v3@229.236,117.874 ; 296.579,202.095 P66.1@299.657,199.017 ; P66.1@299.139,198.922 P65.1@303.467,198.922 P64.1@307.796,198.922
  Bottom Layer w0.5: v2(48.535,220.992) 48.55,205.897 52.326,202.122 55.63,205.426 55.63,205.612 76.912,205.612 v5(77.891,206.59) ; 52.43,171.87 76.931,171.87 v5(78.151,170.65) ; 52.953,137.973 77.826,137.973 v5(78.893,136.753) ; 76.912,205.477 v5(77.891,204.498) ; 76.96,171.899 v5(78.157,173.096) ; 77.855,138.002 v5(79.052,139.199) ; 110.667,213.147 135.54,213.147 v5(136.607,211.928) ; 135.569,213.177 v5(136.766,214.373) ; v5(168.485,207.047) 169.531,208.093 169.463,208.16 v5(168.485,209.139) ; 169.698,208.16 198.05,208.16 ; v5(174.463,102.054) 175.659,103.25 ; v5(174.621,104.499) 175.689,103.279 197.983,103.279 ; v5(180.5,132.513) 181.697,133.71 ; v5(180.659,134.959) 181.726,133.739 198.05,133.739 ; v5(183.361,167.927) 184.557,169.123 ; v5(183.519,170.372) 184.586,169.153 198.05,169.153 ; v5(224.6,105.239) 225.797,106.435 ; v5(224.759,107.684) 225.826,106.465 240.252,106.465 ; C90.2@228.747,164.466 232.082,164.466 232.76,163.787 232.76,161.39 ; C99.2@229.091,159.35 229.02,159.453 232.326,159.453 232.76,159.887 232.76,161.39 ; C89.2@244.864,213.049 248.199,213.049 248.877,212.371 248.877,209.974 ; C98.2@245.207,207.934 245.137,208.037 248.442,208.037 248.877,208.471 248.877,209.974 ; C109.2@245.92,164.463 242.585,164.463 241.907,163.785 241.907,162.394 241.672,162.159 240.903,161.39 232.76,161.39 ; C108.2@262.037,213.047 258.702,213.047 258.024,212.369 258.024,210.977 257.789,210.742 257.02,209.974 248.877,209.974 ; v3(281.292,104.871) 281.677,105.256 286.744,105.256 v2(286.744,103.043) ; v2(285.383,125.659) 286.643,124.399 v2(286.643,118.994) 286.643,105.483 286.72,105.406 ; C120.2@296.687,182.352 296.789,182.422 296.789,179.117 297.224,178.682 298.726,178.682 ; C126.2@301.8,165.523 301.8,168.858 301.122,169.536 299.73,169.536 299.495,169.771 298.726,170.54 298.726,178.682 ; C115.2@301.802,182.695 301.802,179.361 301.124,178.682 298.726,178.682 ; v3(304.899,102.272) 305.337,102.709 v2(310.274,102.709)
  Bottom Layer w1: 51.879,167.459 52.326,167.459 ; 52.326,138.65 52.953,138.022 52.953,137.973 52.503,137.523 ; 109.977,213.159 113.633,209.503 113.633,191.122 v4(117.844,186.91) ; 197.983,133.39 198.05,133.457 198.05,133.739 ; v4@207.561,206.485 v4(207.524,206.448) 220.903,193.07 220.903,161.36 223.047,159.215 C99.2@228.783,159.215 ; v4@207.625,206.448 v4@207.67,245.275 ; J21.1@216.658,230.777 v4@216.658,245.829 ; 221.202,160.884 222.795,159.291 ; v4(229.804,206.571) v4@229.849,245.481 ; 236.546,212.345 241.093,207.799 C98.2@244.899,207.799 ; v4@236.57,245.609 236.574,230.777 236.58,212.462 ; v4(280.801,213.819) 280.837,213.856 280.837,221.793 281.931,222.887 281.931,236.573 280.837,237.667 280.837,245.604 ; v4(296.124,245.785) 295.403,245.064 295.403,231.535 303.092,223.845 v4(303.081,213.943) 303.048,213.943 296.552,207.447 C120.2@296.552,182.66 ; v4@306.611,245.709 306.611,239.253 309.184,236.681 309.184,226.524 308.463,225.803 308.463,215.646 v4(310.107,214.002) ; 317.818,86.181 323.05,91.262 323.05,110.077 v2(323.05,129.302) 323.05,135.225 323.05,138.892 323.05,141.737 323.05,147.048 v2@323.06,147.058 ; v2@323.2,147.058 323.2,153.025 323.2,182.844 333.617,193.26 v4(333.617,213.768) ; v4@333.653,213.805 v4@333.653,245.553
  Bottom Layer w1.5: v4@47.286,167.274 51.694,167.274 ; 52.326,138.65 52.326,167.274 ; 52.326,167.459 52.326,202.122 52.326,218.769 56.154,222.597 100.538,222.597 109.977,213.159 ; 52.503,137.523 52.503,92.314 58.636,86.181 317.818,86.181 ; v4@119.249,71.081 v4@119.249,75.68 ; 197.983,86.584 197.983,103.279 197.983,133.39 ; 198.05,133.739 198.05,169.153 198.05,208.16 ; 239.848,86.672 239.848,106.297 ; 300.645,230.003 300.695,229.971 v4@300.695,245.353
  other v2: 6,54 12,54 9,60 15,60 33,60 6,66 12,66 18,66 6,78 12,78 18,78 30,78 9,84 21,84 45,84 327,84 333,84 339,84 345,84 6,90 18,90 30,90 60,90 78,90 84,90 90,90 96,90 102,90 258,90 264,90 270,90 282,90 288,90 312,90 336,90 342,90 9,96 21,96 63,96 87,96 93,96 99,96 105,96 123,96 261,96 267,96 273,96 297,96 315,96 333,96 339,96 345,96 6,102 12,102 18,102 30,102 54,102 60,102 90,102 96,102 102,102 108,102 258,102 264,102 270,102 276,102 294,102 318,102 336,102 342,102 9,108 15,108 57,108 63,108 93,108 99,108 105,108 123,108 261,108 267,108 273,108 309,108 333,108 339,108 345,108 323.048,110.077 12,114 30,114 54,114 60,114 84,114 90,114 96,114 108,114 258,114 264,114 270,114 342,114 323.082,116 323.011,119.78 9,120 15,120 21,120 105,120 267,120 273,120 333,120 339,120 345,120 6,126 12,126 18,126 24,126 30,126 102,126 108,126 120,126 258,126 264,126 270,126 294,126 300,126 336,126 342,126 9,132 15,132 105,132 261,132 267,132 273,132 279,132 333,132 323.085,135.225 6,138 12,138 18,138 24,138 30,138 108,138 258,138 264,138 270,138 276,138 300,138 336,138 342,138 9,144 21,144 267,144 273,144 297,144 333,144 323.2,147.102 6,150 12,150 18,150 30,150 120,150 270,150 300,150 342,150 323.235,153.025 9,156 15,156 339,156 6,162 18,162 312,162 318,162 342,162 225,168 237,168 315,168 321,168 333,168 339,168 345,168 6,174 12,174 18,174 24,174 42,174 48,174 228,174 240,174 252,174 258,174 306,174 324,174 336,174 342,174 9,180 21,180 27,180 39,180 309,180 315,180 333,180 339,180 345,180 264,186 270,186 306,186 312,186 324,186 336,186 342,186 9,192 39,192 45,192 273,192 321,192 327,192 345,192 6,198 12,198 24,198 30,198 36,198 42,198 48,198 324,198 330,198 27,204 39,204 45,204 273,204 333,204 339,204 345,204 6,210 12,210 36,210 42,210 276,210 9,216 15,216 39,216 45,216 207,216 213,216 219,216 225,216 237,216 249,216 273,216 339,216 345,216 6,222 24,222 36,222 228,222 234,222 240,222 246,222 258,222 264,222 276,222 282,222 300,222 9,228 33,228 225,228 249,228 273,228 285,228 291,228 327,228 333,228 339,228 345,228 6,234 12,234 30,234 42,234 54,234 60,234 72,234 78,234 84,234 90,234 96,234 102,234 108,234 114,234 120,234 126,234 138,234 144,234 162,234 168,234 180,234 186,234 222,234 228,234 246,234 270,234 282,234 288,234 294,234 330,234 21,240 315,240 321,240 327,240 333,240 345,240 54,246 60,246 66,246 72,246 78,246 84,246 90,246 96,246 102,246 108,246 114,246 120,246 126,246 132,246 138,246 144,246 150,246 156,246 162,246 168,246 174,246 180,246 186,246 192,246 198,246 222,246 246,246 252,246 258,246 264,246 270,246 288,246 312,246 318,246 324,246
  other v3: 80.341,101.534 82.75,102.203 85.25,102.203 87.75,102.203 78.524,103.251 92.289,103.649 83.128,103.933 85.628,103.933 88.128,103.933 90.586,104.392 80.692,104.495 94.057,105.417 92.353,106.16 95.824,107.185 94.121,107.927 97.592,108.953 95.889,109.695 99.36,110.721 97.657,111.463 101.128,112.488 99.424,113.231 179.11,113.512 102.895,114.256 101.192,114.999 104.663,116.024 229.247,116.697 102.96,116.766 106.431,117.792 104.728,118.534 107.663,119.967 105.934,120.724 107.663,122.467 105.934,123.224 107.663,124.967 105.934,125.724 107.663,127.467 74.405,127.741 105.934,128.224 107.663,129.967 105.934,130.724 107.663,132.467 105.934,133.224 107.663,134.967 105.934,135.724 105.934,138.224 108.426,139.848 106.727,140.595 110.194,141.615 108.495,142.362 111.962,143.383 185.147,143.971 110.263,144.13 113.729,145.151 112.031,145.898 115.497,146.919 113.798,147.666 125.195,148.539 117.265,148.686 115.566,149.433 121.694,149.594 123.428,150.306 117.334,151.201 119.73,151.916 121.509,151.909 73.709,162.245 188.008,179.385 132.119,202.915 173.441,217.729
  other v4: 119.289,71.192 119.231,75.68 207.57,245.597 333.69,245.59 216.759,245.609 236.597,245.609 306.617,245.709 300.619,245.781 229.749,245.803 280.288,245.988
IBIAS_ADAPT: J13.28 P48.2 | length 256.7
  Top Layer w0.2: v1(123.567,130.396) 123.552,130.412 123.552,131.609 123.825,131.883 J13.28@123.825,135.862
  Layer 2 w0.2: v1@123.566,130.551 123.567,130.551 140.205,130.551 148.991,130.551 153.181,126.361 153.181,86.4 161.384,78.197 308.213,78.197 316.622,86.606 316.622,94.441 P48.2@317.763,95.582
IBIAS_ADAPT_PRE: P48.1 U61.3 | length 4.4
  Top Layer w0.2: U61.3@313.711,93.819 314.054,93.819 314.831,93.042 P48.1@317.763,93.042
IBIAS_AFE: J13.26 P47.2 | length 235.7
  Top Layer w0.2: v1(124.052,131.105) 124.232,131.105 124.287,131.16 ; 124.287,131.145 124.287,131.16 ; J13.26@124.335,136.465 124.275,136.404 124.275,131.173 124.287,131.16
  Layer 2 w0.2: v1(124.052,131.105) 124.085,131.072 124.552,131.072 124.568,131.056 124.982,131.056 124.998,131.072 149,131.072 153.547,126.525 153.547,86.717 161.767,78.497 289.735,78.497 293.283,82.045 293.283,94.965 P47.2@294.233,95.915
IBIAS_AFE_PRE: P47.1 U58.3 | length 4.4
  Top Layer w0.2: U58.3@290.181,94.153 290.524,94.153 291.301,93.375 P47.1@294.233,93.375
IBIAS_SLEW: J13.24 P46.2 | length 249.6
  Top Layer w0.2: v1(124.775,131.556) 124.775,136.404 J13.24@124.836,136.465
  Layer 2 w0.2: v1(124.775,131.556) 148.941,131.556 153.847,126.65 153.847,87.342 162.392,78.797 289.611,78.797 292.983,82.169 292.983,110.718 P46.2@294.132,111.867
IBIAS_SLEW_PRE: P46.1 U56.3 | length 4.4
  Top Layer w0.2: U56.3@290.08,110.104 290.423,110.104 291.2,109.327 P46.1@294.132,109.327
LDACb: J18.D27 J19.61 U50.16 U52.18 U54.18 U69.18 | length 503.9
  Top Layer w0.2: U54.18@317.981,133.749 320.919,133.749 v5(320.921,133.751) ; U69.18@318.265,114.595 320.557,114.595 320.827,114.865 v5(320.962,114.865) ; U54.18@318.326,133.868 U54.18@318.359,133.901 ; U52.18@318.504,151.714 318.607,151.611 321.095,151.611 v2(321.13,151.645) ; U69.18@318.61,114.714 U69.18@318.643,114.747
  Layer 1 w0.1: U50.16@31.43,28.109 40.379,19.16 40.431,19.16
  Layer 1 w0.15: 40.431,19.16 278.984,19.16 286.441,26.617 v3(338.381,26.617) ; J19.61@263.604,60.323 263.604,52.856 263.824,52.636 v3(263.824,52.52)
  Layer 2 w0.15: v3(252.759,19.16) 252.814,19.215 252.814,23.332 263.824,34.342 v3(263.824,52.52) ; J19.61@263.604,60.323 264.862,61.581 264.862,63.955 265.144,64.237 265.144,65.817 274.98,75.653 306.411,75.653 317.147,86.388 317.147,89.2 320.281,92.335 320.281,113.755 320.934,114.408 ; 320.936,114.409 320.936,114.865 320.936,117.446 319.799,118.583 319.799,132.628 v5(320.921,133.751) 320.919,133.753 320.919,142.394 320.541,142.773 320.541,151.056 v2(321.13,151.645)
  Bottom Layer w0.15: v3@338.42,26.578 J18.D27@339.433,26.578
NetC76_1: C76.1 R47.2 U55.4 U56.2 | length 12.1
  Top Layer w0.2: U55.4@281.667,109.48 U55.4@281.704,109.443 ; U55.4@281.726,109.421 U55.4@281.704,109.443 ; R47.2@288.144,113.923 288.476,113.591 288.476,112.408 289.139,111.745 289.139,110.503 288.57,109.934 288.57,109.534 288.441,109.406 U56.2@288.099,109.406 288.061,109.443 U55.4@281.704,109.443
NetC76_2: C76.2 U55.1 U56.1 | length 9.8
  Top Layer w0.2: U55.1@279.204,111.308 280.251,111.308 280.973,110.587 284.767,110.587 C76.2@285.004,110.825 ; C76.2@285.138,110.954 C76.2@285.338,110.754 ; C76.2@285.139,110.954 285.339,110.754 U56.1@288.327,110.754
NetC81_1: C81.1 R48.2 U57.4 U58.2 | length 12.1
  Top Layer w0.2: U57.4@281.768,93.528 U57.4@281.805,93.491 ; U57.4@281.827,93.47 U57.4@281.805,93.491 ; R48.2@288.245,97.972 288.577,97.64 288.577,96.457 289.24,95.793 289.24,94.552 288.671,93.983 288.671,93.583 288.542,93.454 U58.2@288.2,93.454 288.162,93.491 U57.4@281.805,93.491
NetC81_2: C81.2 U57.1 U58.1 | length 9.8
  Top Layer w0.2: U57.1@279.305,95.357 280.352,95.357 281.074,94.636 284.868,94.636 C81.2@285.105,94.873 ; C81.2@285.239,95.003 C81.2@285.439,94.803 ; C81.2@285.24,95.003 285.44,94.803 U58.1@288.428,94.803
NetC88_1: C88.1 R50.2 U60.4 U61.2 | length 12.1
  Top Layer w0.2: U60.4@305.298,93.195 U60.4@305.335,93.158 ; U60.4@305.357,93.136 U60.4@305.335,93.158 ; R50.2@311.775,97.638 312.107,97.306 312.107,96.123 312.77,95.46 312.77,94.218 312.201,93.649 312.201,93.249 312.072,93.121 U61.2@311.73,93.121 311.693,93.158 U60.4@305.335,93.158
NetC88_2: C88.2 U60.1 U61.1 | length 9.8
  Top Layer w0.2: U60.1@302.835,95.023 303.882,95.023 304.604,94.302 308.398,94.302 C88.2@308.635,94.54 ; C88.2@308.769,94.669 C88.2@308.969,94.469 ; C88.2@308.77,94.669 308.97,94.469 U61.1@311.958,94.469
NetC91_1: C91.1 R51.2 R60.1 U64.8@255.996,212.291 | length 12.5
  Top Layer w0.2: U64.8@256.072,212.216 U64.8@255.996,212.291 256.113,212.407 R51.2@256.113,215.607 ; U64.8@256.344,212.216 261.209,212.216 R60.1@261.612,211.813 ; R60.1@261.974,211.387 265.372,211.387 C91.1@265.543,211.558
NetC91_2: C91.2 R60.2 R67.2 U64.5@255.996,208.481 | length 18.2
  Top Layer w0.2: U64.5@255.996,208.481 255.996,200.084 R67.2@256.014,200.067 ; U64.5@256.25,208.481 260.677,208.481 261.877,209.681 R60.2@261.974,209.681 265.521,209.681 C91.2@265.543,209.704